# Altium PCB PCB1.PcbDoc
Units mm, origin at the board's own origin, x right, y up, seen from the top; angles counter-clockwise.
Board outline 105.66 x 101.6 mm, 5 copper layers (Top Layer, Mid-Layer 1, Mid-Layer 2, Mid-Layer 3, Bottom Layer); 15 components, 189 nets, 383 pads, 28 vias.
Unrouted connection lines stored in the file: 20.
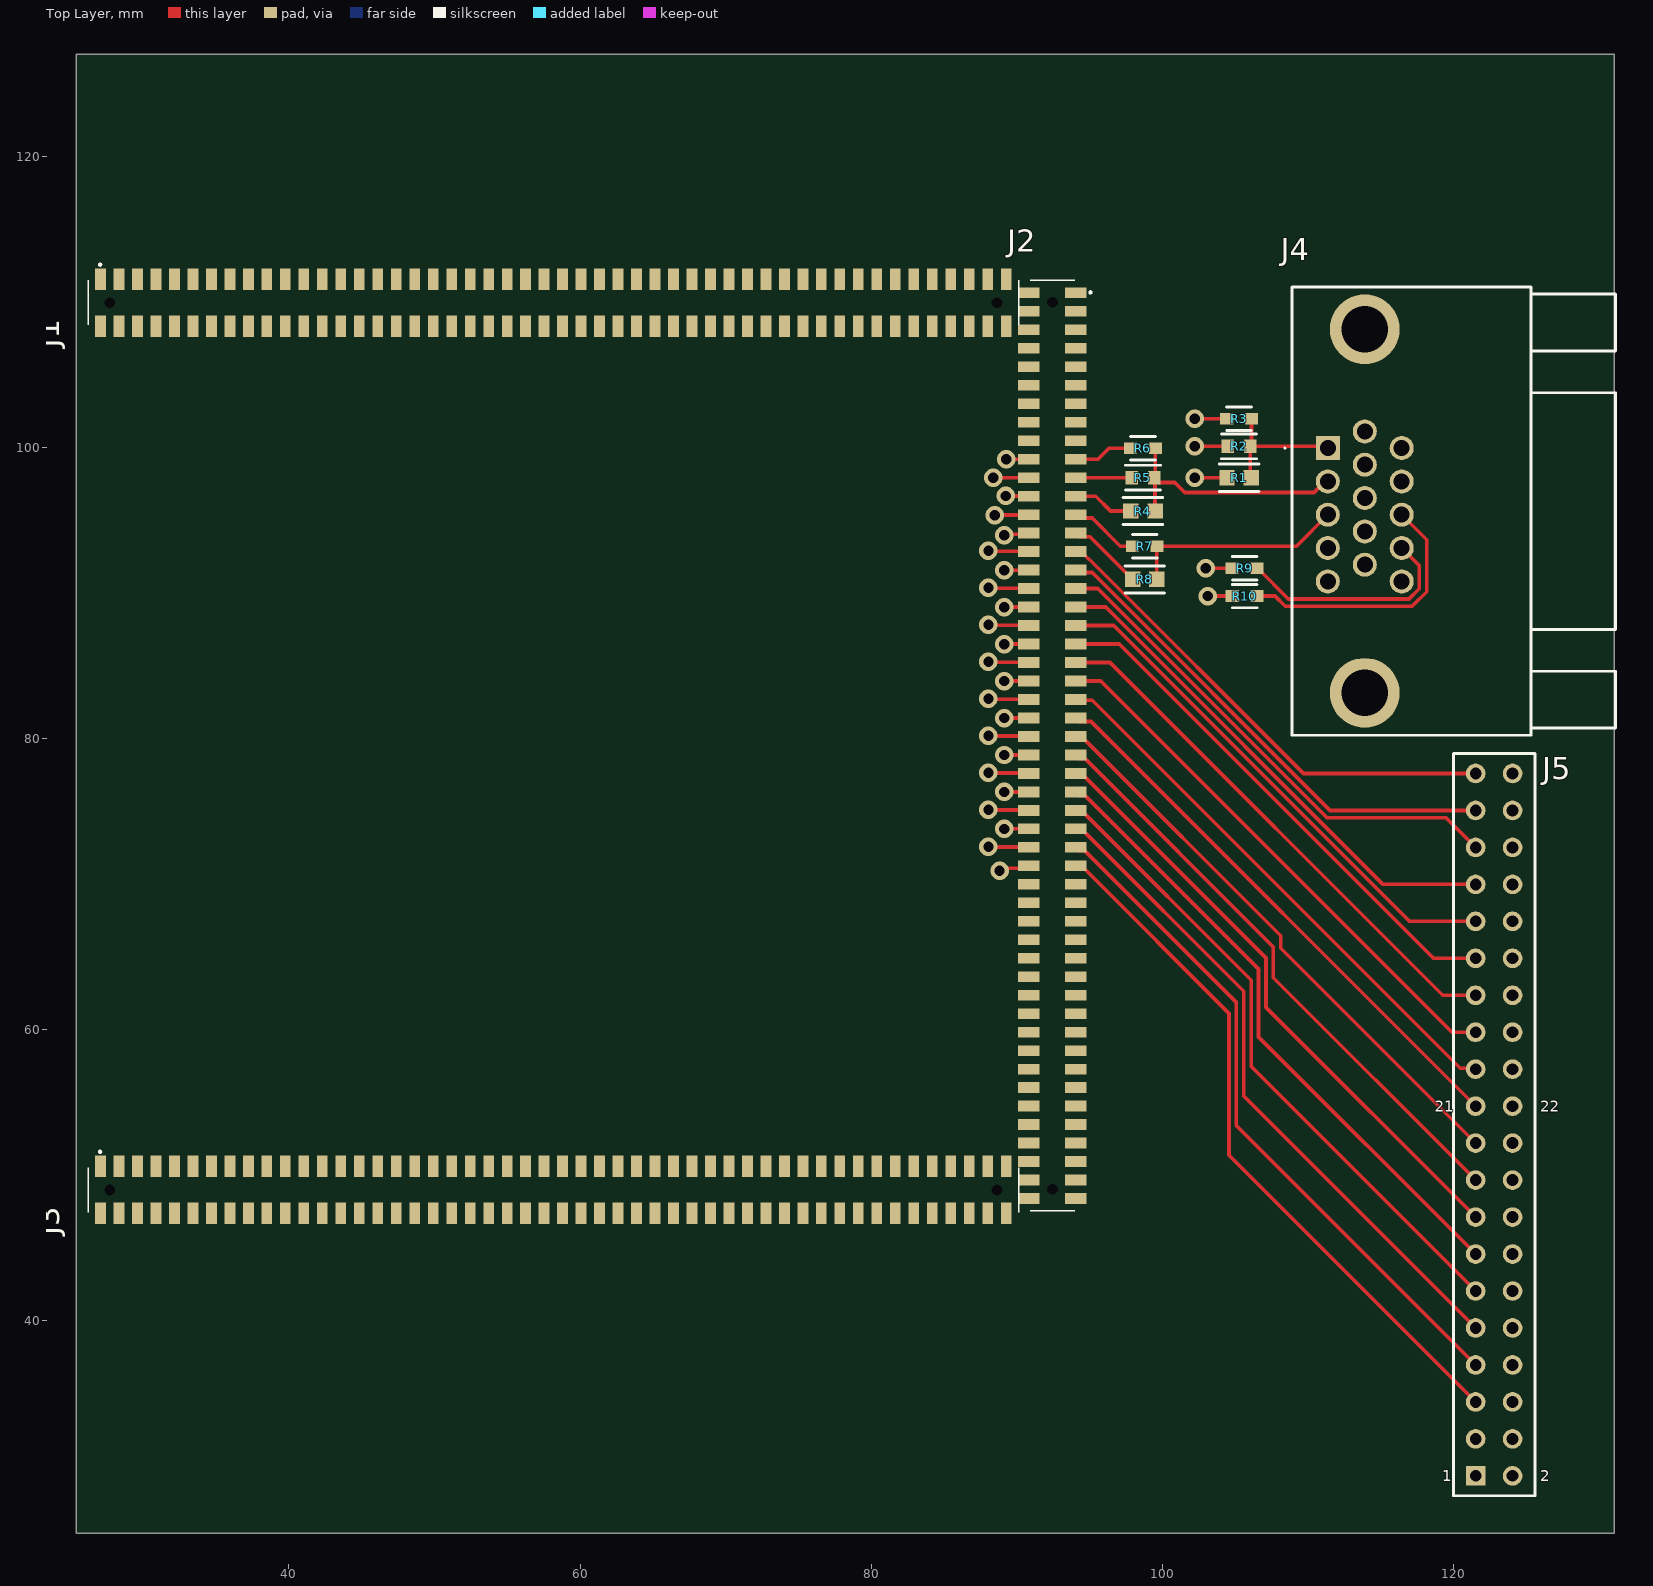
[diagram p0: Top Layer view]
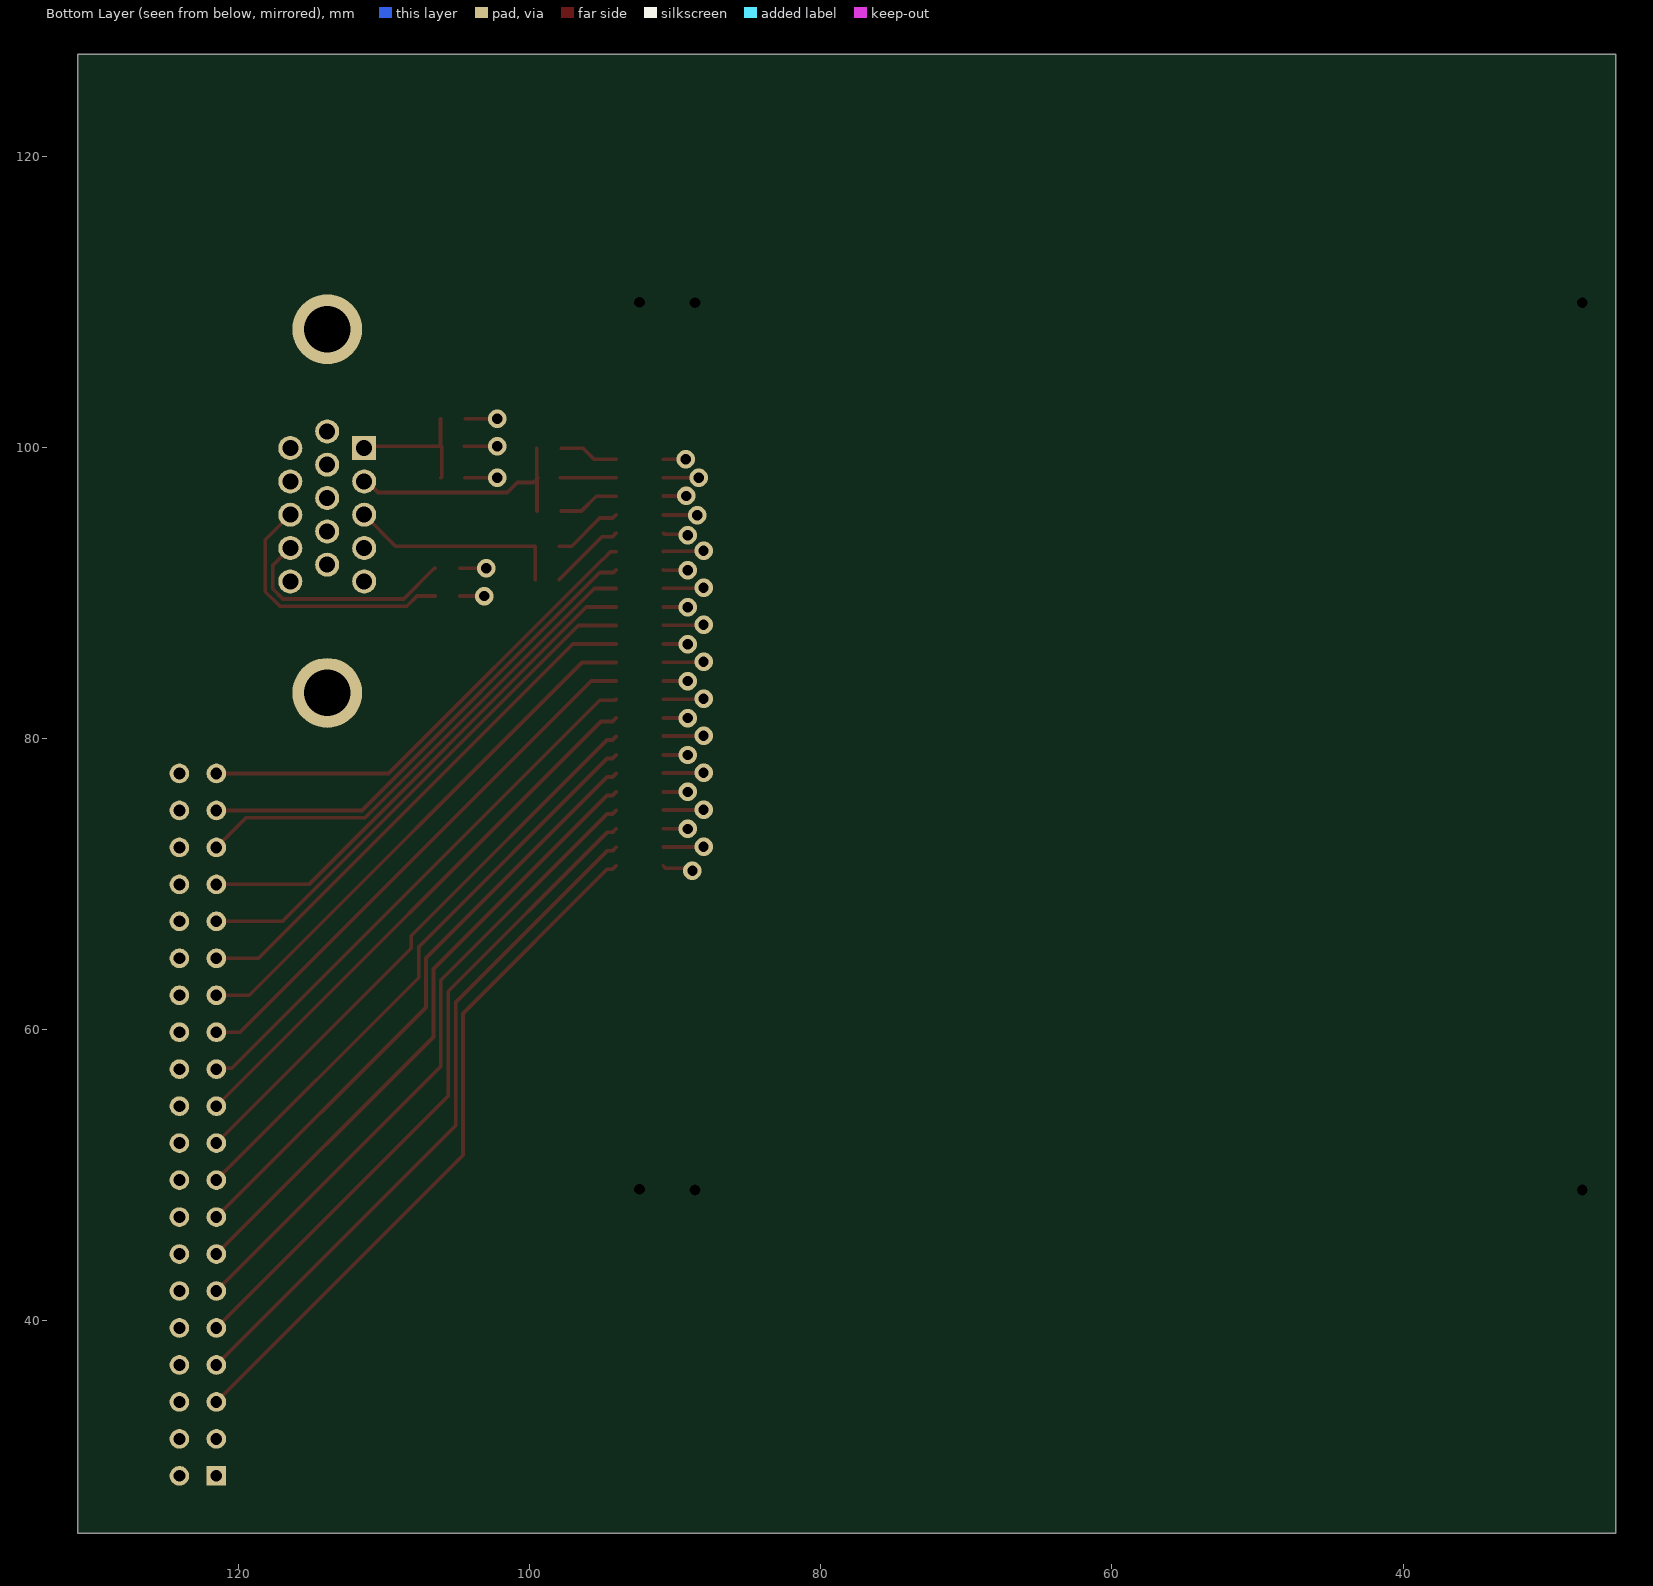
[diagram p1: Bottom Layer view, seen from below]
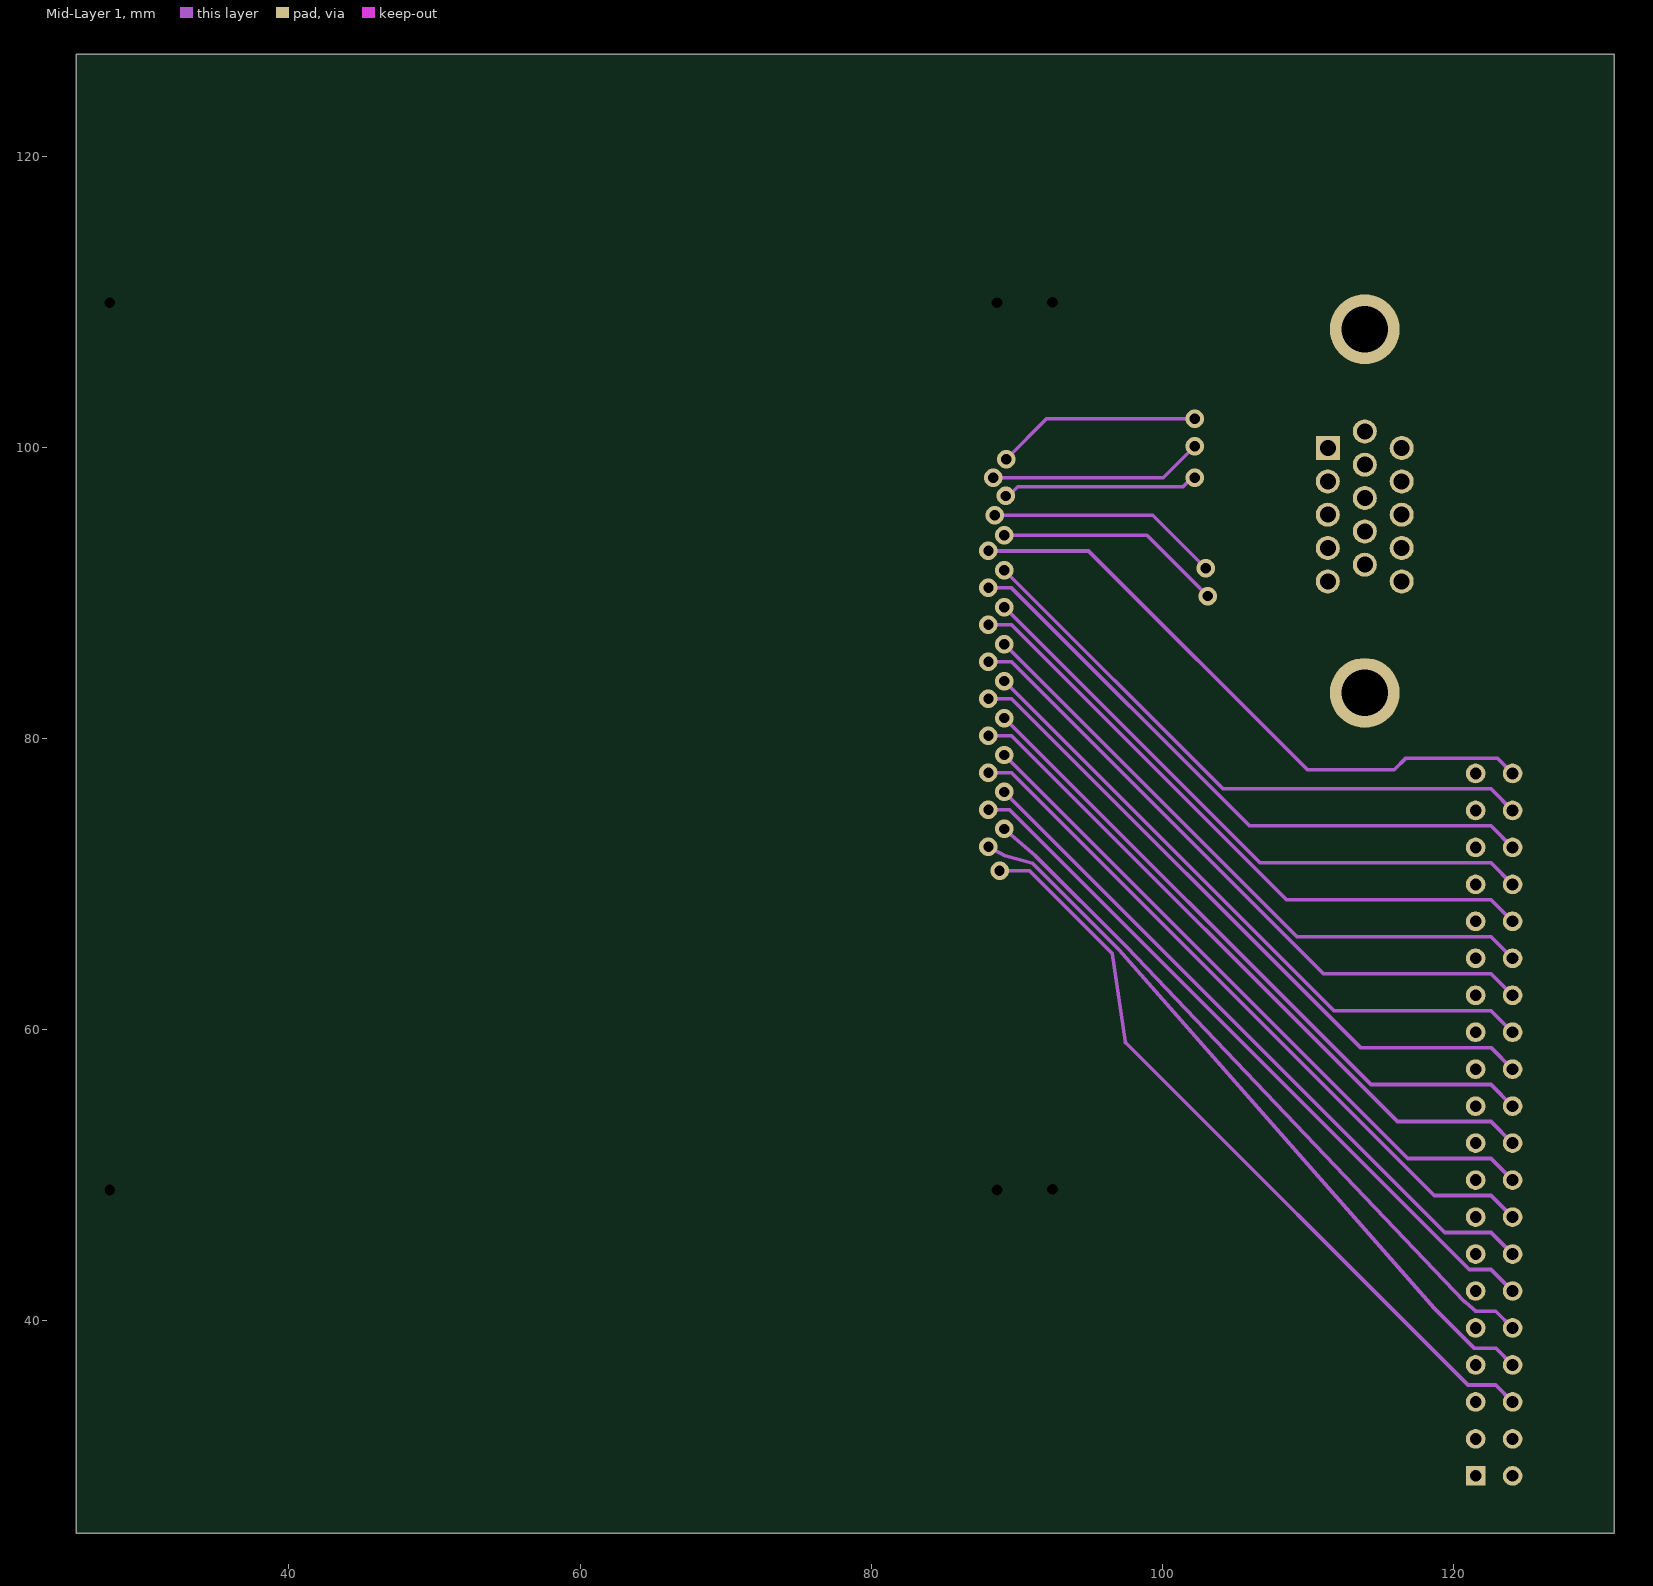
[diagram p2: Mid-Layer 1]
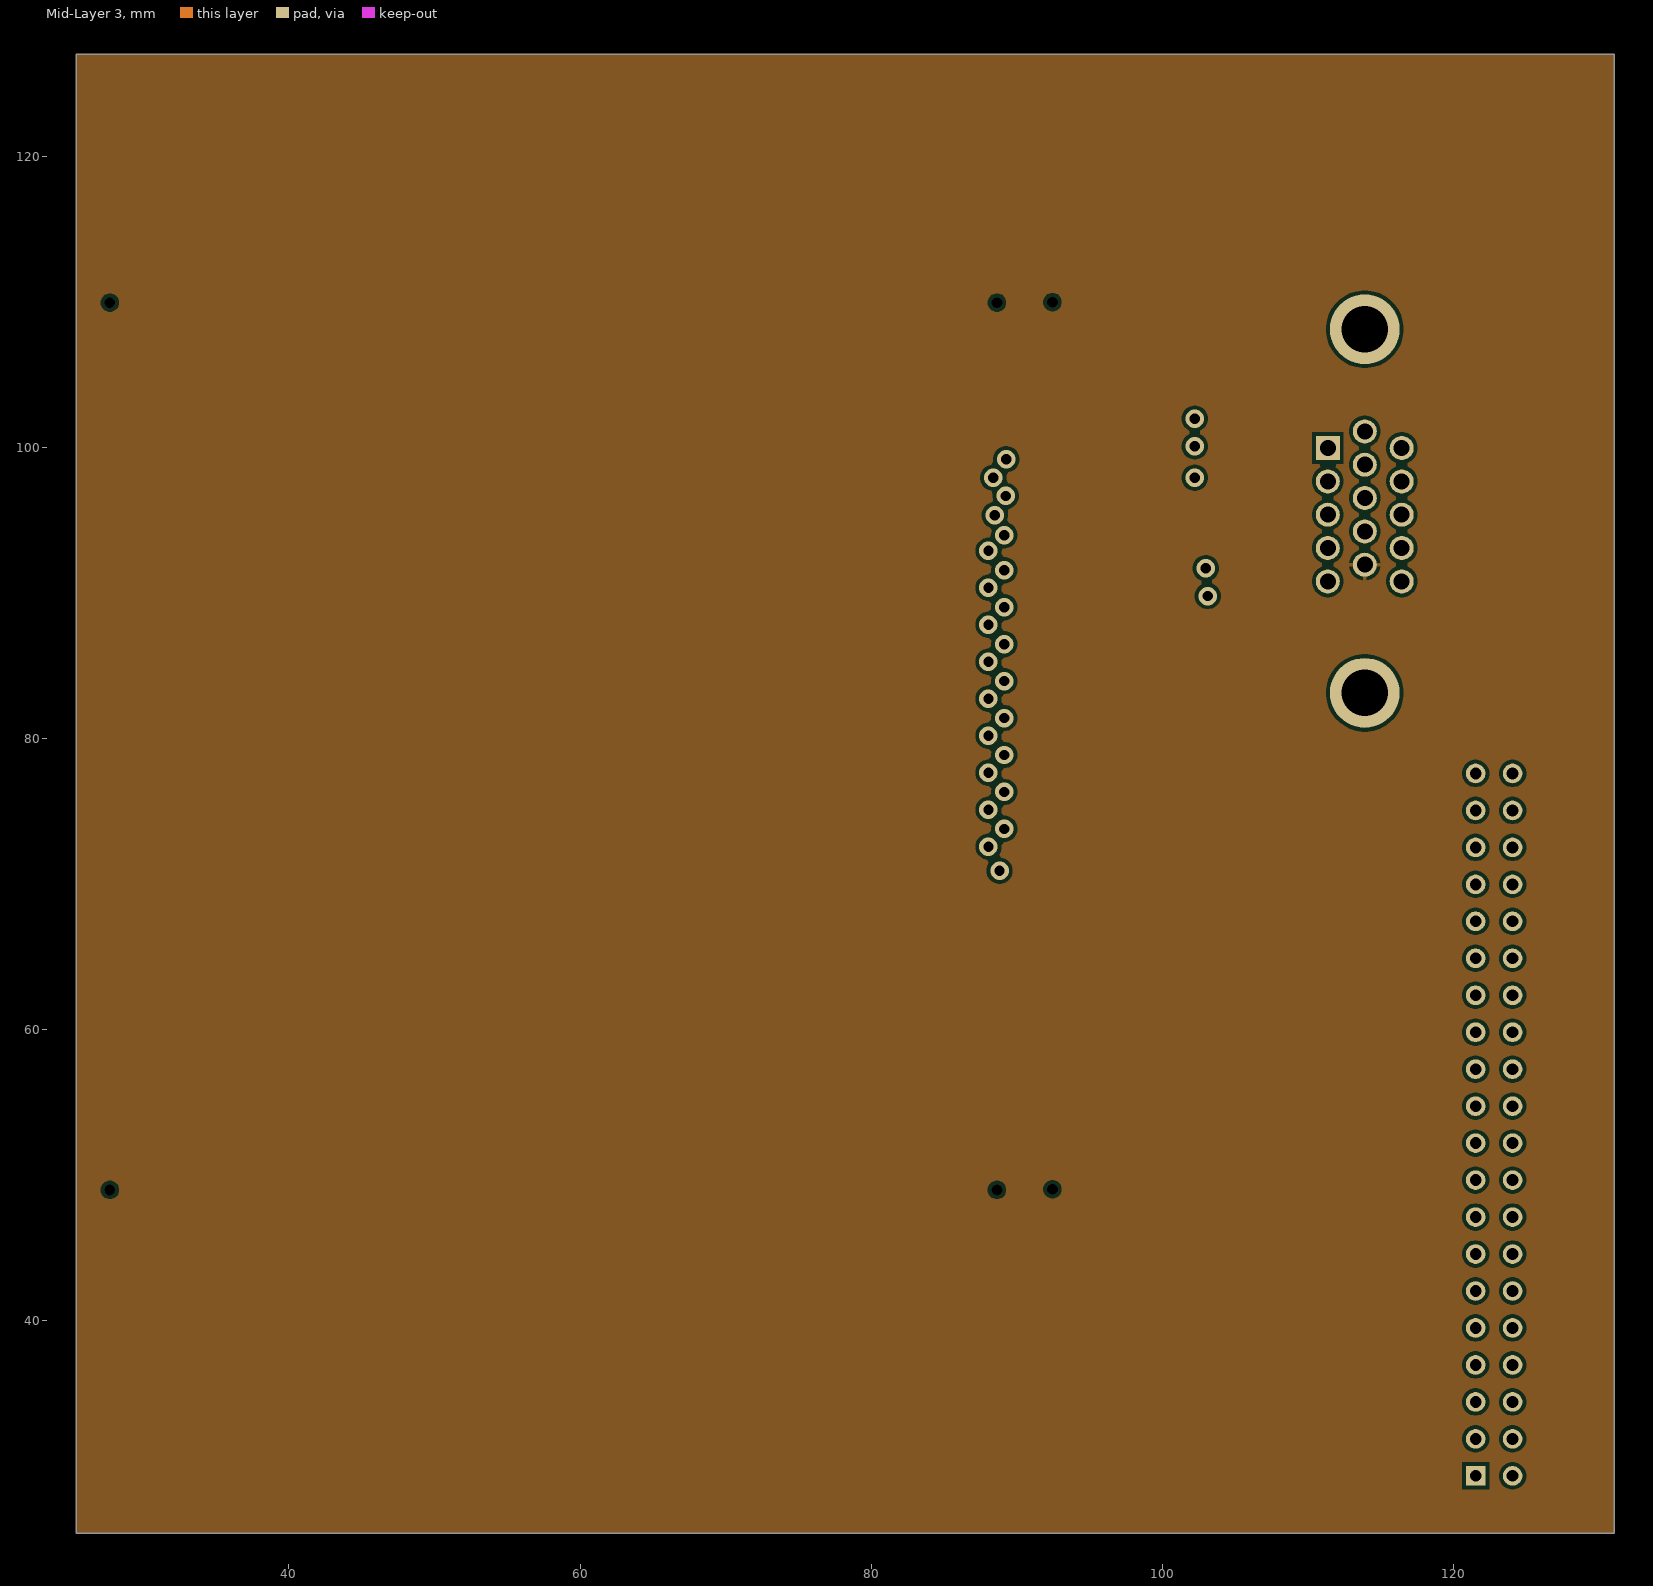
[diagram p3: Mid-Layer 3]
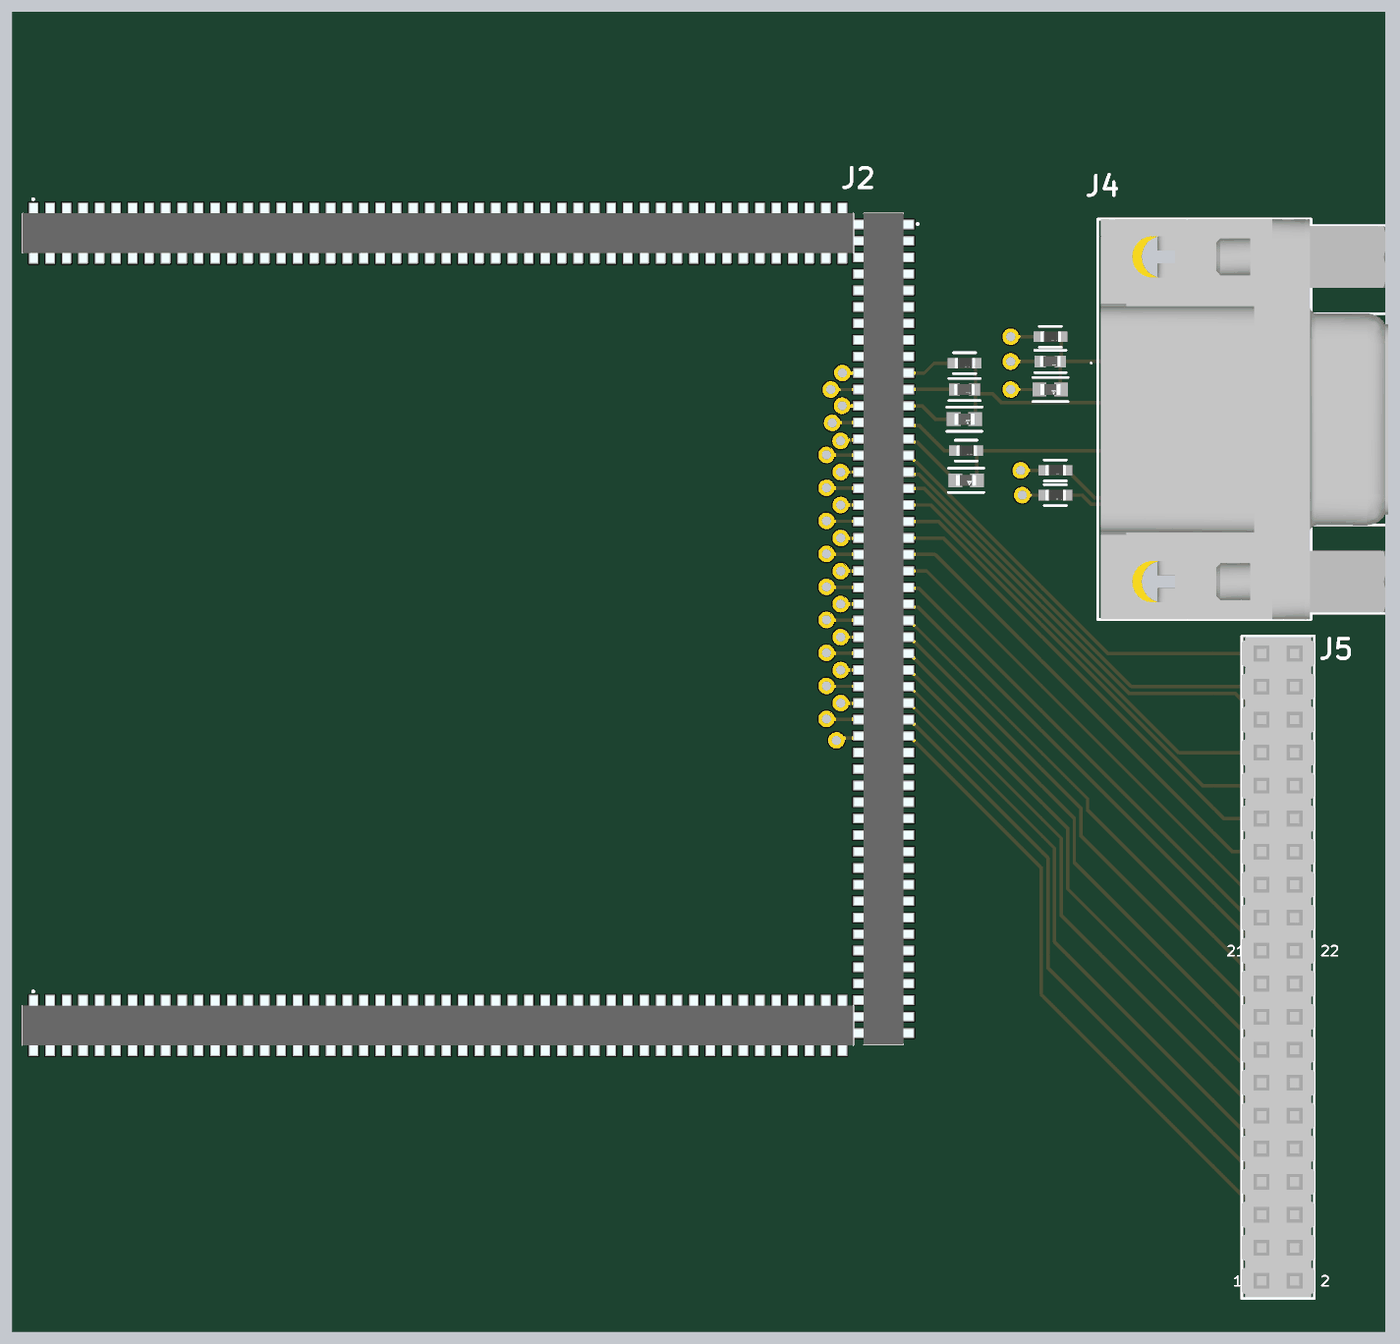
[diagram p4: 3D render of the assembled board from above, using the file's embedded part models]

## Layer stack, top to bottom
Top Solder: solder mask 0.0102, Solder Resist, Dk 3.5
Top Layer: signal copper 0.0356
Dielectric 1: dielectric 0.32, FR-4, Dk 4.8
Mid-Layer 1: signal copper 0.0356
Dielectric3: dielectric 0.32, FR-4, Dk 4.8
Mid-Layer 2: signal copper 0.0356
Dielectric4: dielectric 0.32, FR-4, Dk 4.8
Mid-Layer 3: signal copper 0.0356
Dielectric2: dielectric 0.32, FR-4, Dk 4.8
Bottom Layer: signal copper 0.0356
Bottom Solder: solder mask 0.0102, Solder Resist, Dk 3.5

## Board outline
25.4,25.4 131.064,25.4 131.064,127 25.4,127

## Design rules (kind name [scope] priority, off if disabled: settings)
Clearance [All] p1: gap=0.254 ignorepadtopadclearanceinfootprint=FALSE
PolygonConnect [All] p1: connectstyle=Relief reliefconductorwidth=0.254 reliefentries=4 polygonreliefangle="90 Angle" airgapwidth=0.254
RoutingVias [All] p1: holewidth=0.711 width=1.27 viastyle="Through Hole" minholewidth=0.711 minwidth=1.27 maxholewidth=0.711 maxwidth=1.27
SolderMaskExpansion [All] p1: expansion=0.102 istentingtop=FALSE
SupplyNets "Schematic Supply Nets_2" [InNet('VDD12')] p1: voltage=0.000
SupplyNets "Schematic Supply Nets_1" [InNet('VDD3.3')] p2: voltage=0.000
SupplyNets "Schematic Supply Nets" [InNet('GND')] p3: voltage=0.000
Width [All] p1: maxlimit=0.254 minlimit=0.254 preferedwidth=0.254
30 further rules are at their usual default settings.

## Classes and differential pairs
component class BOARD_GPIO: J5
component class VGA: J4 R1 R2 R3 R4 R5 R6 R7 R8 R9 R10
component class FPGA_GPIO: J1 J2 J3

## Components (designator, comment, footprint, x,y, rotation, side; value= is the part's Value field where it differs from the comment)
J1 "CLP-150-02-L-D-A" CLP-150-02-XXX-D-A 58.166,109.946 r180 top
J2 "CLP-150-02-L-D-A" CLP-150-02-XXX-D-A 92.456,79.507 r90 top
J3 "CLP-150-02-L-D-A" CLP-150-02-XXX-D-A 58.166,48.986 r180 top
J4 "L77HDE15SD1CH4FVGA" L77HDE15SD1CH4FVGA 111.379,99.957 r90 top
J5 "CES-120-02-L-D" SMTC-CES-120-02-X-D 121.539,29.337 r90 top
R1 "MCT06030C2001FP500" FP-MCT0603-IPC_A 105.283,97.917 r0 top
R2 "AT0603FRE071KL" FP-AT0603-IPC_B 105.283,100.076 r0 top
R3 "RT0603FRE07510RL" FP-RT0603-MFG 105.283,101.981 r0 top value=510Ω
R4 "MCT06030C2001FP500" FP-MCT0603-IPC_A 98.679,95.631 r0 top
R5 "AT0603FRE071KL" FP-AT0603-IPC_B 98.679,97.917 r0 top
R6 "RT0603FRE07510RL" FP-RT0603-MFG 98.679,99.949 r0 top value=510Ω
R7 "RT0603FRE07866RL" FP-RT0603-MFG 98.806,93.218 r0 top value=866Ω
R8 "MCT06030C4640FP500" FP-MCT0603-IPC_A 98.806,90.932 r0 top
R9 "RT0603FRE0747RL" FP-RT0603-MFG 105.664,91.694 r0 top value=47Ω
R10 "RT0603FRE0747RL" FP-RT0603-MFG 105.664,89.789 r0 top value=47Ω

## Footprints (in the part's own frame and the unit in brackets; to place one, negate y for a bottom-side part, rotate by r counter-clockwise, add the part's x,y. Pads: shape width x height; smd on the part's side, far side on the other; paste and mask are expansions set on the pad)
CLP-150-02-XXX-D-A [mm]
  rect 0.74x1.47 smd: 1(31.115,-1.615) 2(31.115,1.615) 3(29.845,-1.615) 4(29.845,1.615) 5(28.575,-1.615) 6(28.575,1.615) 7(27.305,-1.615) 8(27.305,1.615) 9(26.035,-1.615) 10(26.035,1.615) 11(24.765,-1.615) 12(24.765,1.615) 13(23.495,-1.615) 14(23.495,1.615) 15(22.225,-1.615) 16(22.225,1.615) 17(20.955,-1.615) 18(20.955,1.615) 19(19.685,-1.615) 20(19.685,1.615) 21(18.415,-1.615) 22(18.415,1.615) 23(17.145,-1.615) 24(17.145,1.615) 25(15.875,-1.615) 26(15.875,1.615) 27(14.605,-1.615) 28(14.605,1.615) 29(13.335,-1.615) 30(13.335,1.615) 31(12.065,-1.615) 32(12.065,1.615) 33(10.795,-1.615) 34(10.795,1.615) 35(9.525,-1.615) 36(9.525,1.615) 37(8.255,-1.615) 38(8.255,1.615) 39(6.985,-1.615) 40(6.985,1.615) 41(5.715,-1.615) 42(5.715,1.615) 43(4.445,-1.615) 44(4.445,1.615) 45(3.175,-1.615) 46(3.175,1.615) 47(1.905,-1.615) 48(1.905,1.615) 49(0.635,-1.615) 50(0.635,1.615) 51(-0.635,-1.615) 52(-0.635,1.615) 53(-1.905,-1.615) 54(-1.905,1.615) 55(-3.175,-1.615) 56(-3.175,1.615) 57(-4.445,-1.615) 58(-4.445,1.615) 59(-5.715,-1.615) 60(-5.715,1.615) 61(-6.985,-1.615) 62(-6.985,1.615) 63(-8.255,-1.615) 64(-8.255,1.615) 65(-9.525,-1.615) 66(-9.525,1.615) 67(-10.795,-1.615) 68(-10.795,1.615) 69(-12.065,-1.615) 70(-12.065,1.615) 71(-13.335,-1.615) 72(-13.335,1.615) 73(-14.605,-1.615) 74(-14.605,1.615) 75(-15.875,-1.615) 76(-15.875,1.615) 77(-17.145,-1.615) 78(-17.145,1.615) 79(-18.415,-1.615) 80(-18.415,1.615) 81(-19.685,-1.615) 82(-19.685,1.615) 83(-20.955,-1.615) 84(-20.955,1.615) 85(-22.225,-1.615) 86(-22.225,1.615) 87(-23.495,-1.615) 88(-23.495,1.615) 89(-24.765,-1.615) 90(-24.765,1.615) 91(-26.035,-1.615) 92(-26.035,1.615) 93(-27.305,-1.615) 94(-27.305,1.615) 95(-28.575,-1.615) 96(-28.575,1.615) 97(-29.845,-1.615) 98(-29.845,1.615) 99(-31.115,-1.615) 100(-31.115,1.615)
  round 0.37 hole 0.74 unplated: 101(30.475,0) 102(-30.475,0)
  silkscreen extent -31.96,-2.66 31.96,1.52, body extent -31.97,-2.28 31.97,2.28, height 2.47
FP-AT0603-IPC_B [mm]
  rect 0.859x0.912 smd paste+0 mask+0: 1(-0.777,0) 2(0.777,0)
  silkscreen extent -1.21,-0.86 1.21,0.86, body extent -1.46,-0.71 1.46,0.71, height 0.25
FP-MCT0603-IPC_A [mm]
  rect 1.064x1.062 smd paste+0 mask+0: 1(-0.829,0) 2(0.829,0)
  silkscreen extent -1.36,-0.93 1.36,0.93, body extent -1.86,-1.03 1.86,1.03, height 0.25
FP-RT0603-MFG [mm]
  rect 0.9x0.8 smd paste+0 mask+0: 1(-0.85,0) 2(0.85,0)
  silkscreen extent -0.85,-0.81 0.86,0.8, body extent -1.4,-0.55 1.4,0.55, height 0.25
L77HDE15SD1CH4FVGA [mm]
  rect 1.65x1.65 hole 1.1: 1(0,0)
  round 1.65 hole 1.1: 2(-2.29,0) 3(-4.58,0) 4(-6.87,0) 5(-9.16,0) 6(1.145,-2.54) 7(-1.145,-2.54) 8(-3.435,-2.54) 9(-5.725,-2.54) 10(-8.015,-2.54) 11(0,-5.08) 12(-2.29,-5.08) 13(-4.58,-5.08) 14(-6.87,-5.08) 15(-9.16,-5.08)
  round 4.8 hole 3.2: MH1(8.165,-2.54) MH2(-16.825,-2.54)
  silkscreen extent -19.74,-19.77 11.07,3, body extent -19.73,-19.89 11.08,2.21, height 12.48
SMTC-CES-120-02-X-D [mm] "Closed Entry Socket Strip Double Row Assembly, 2x20 Pins, Vertical, 2.54mm Pitch, Female"
  rect 1.35x1.35 hole 0.81: 1(0,0)
  round 1.35 hole 0.81: 2(0,-2.54) 3(2.54,0) 4(2.54,-2.54) 5(5.08,0) 6(5.08,-2.54) 7(7.62,0) 8(7.62,-2.54) 9(10.16,0) 10(10.16,-2.54) 11(12.7,0) 12(12.7,-2.54) 13(15.24,0) 14(15.24,-2.54) 15(17.78,0) 16(17.78,-2.54) 17(20.32,0) 18(20.32,-2.54) 19(22.86,0) 20(22.86,-2.54) 21(25.4,0) 22(25.4,-2.54) 23(27.94,0) 24(27.94,-2.54) 25(30.48,0) 26(30.48,-2.54) 27(33.02,0) 28(33.02,-2.54) 29(35.56,0) 30(35.56,-2.54) 31(38.1,0) 32(38.1,-2.54) 33(40.64,0) 34(40.64,-2.54) 35(43.18,0) 36(43.18,-2.54) 37(45.72,0) 38(45.72,-2.54) 39(48.26,0) 40(48.26,-2.54)
  silkscreen extent -1.37,-4.07 49.63,1.53, body extent -1.27,-4.06 49.53,1.52, height 5.08

## Part data
J1 J2 J3: "Connector", Manufacturer_Name=SAMTEC, Datasheet Link=http://suddendocs.samtec.com/prints/erm8-xxx-xx.x-xxx-dv-xxxx-xx-mkt.pdf, Height=2.37mm, Manufacturer_Part_Number=CLP-150-02-L-D-A
J4: "Connector", Manufacturer_Name="Amphenol Communications Solutions", Mouser Part Number=523-7HDE15SD1CH4FVGA, Arrow Part Number=L77HDE15SD1CH4FVGA, Arrow Price/Stock=https://www.arrow.com/en/products/l77hde15sd1ch4fvga/amphenol-fci?region=nac, Datasheet Link=https://cdn.amphenol-cs.com/media/wysiwyg/files/drawing/l77hde15sd1ch4fvga.pdf, Height=12.85mm, Manufacturer_Part_Number=L77HDE15SD1CH4FVGA, Mouser Price/Stock=https://www.mouser.co.uk/ProductDetail/Amphenol-Commercial-Products/L77HDE15SD1CH4FVGA?qs=ToP8pWlZ0bNtQSp9f8k5Rw%3D%3D
J5: library part CMP-1023-00041-1, "Low Profile Socket Strips, Through-hole, Vertical, -55 to 125 degC, 2.54 mm Pitch, 40-Pin, Female, RoHS", Manufacturer=Samtec, Temperature Range="-55 to 125 degC", ComponentLink1Description="Manufacturer URL", ComponentLink1URL=http://www.samtec.com, ComponentLink2Description=Datasheet, ComponentLink2URL=http://www.samtec.com/documents/webfiles/pdf/CES.PDF, ComponentLink3Description="Package Specification", ComponentLink3URL=http://www.samtec.com/documents/webfiles/cpdf/CES-1XX-XX-X-D%20-MKT.pdf, DatasheetVersion=F-214, Mounting Technology=Through-hole, Orientation=Vertical, PackageDescription="Closed Entry Socket Strip Double Row Assembly", PackageReference=CES-120-02-X-D, PackageVersion="Y, 9/1992", PartNumber=CES-120-02-L-D, Pitch="2.54 mm", RoHS=True
R1 R4: library part CMP-02407-000403-1, "RES SMD 100 OHM 1% 1/8W 0603", Case Code (Imperial)=0603, Case Code (Metric)=1608, Max Operating Temperature=125°C, Max Power Dissipation=125mW, Min Operating Temperature=-55°C, Package Quantity=1, Power Rating=100mW, Resistance=2kR, Temperature Coefficient=50ppm/°C, Tolerance=1%, Voltage Rating=75V, Case/Package=0603, Composition="Thin Film", Contact Plating=Tin, Depth=0.85mm, Height=0.022inch, Lead Free="Lead Free", Length=1.55mm, Military Standard=Not, Mount="Surface Mount", Number of Terminations=2, Packaging="Tape and Reel", Radiation Hardening=No, REACH SVHC="No SVHC", Voltage Rating (DC)=75V, Width=0.033inch
R2 R5: library part CMP-03412-039220-1, "Thin Film Chip Resistors Automotive Grade 1kΩ 1% 50ppm/°C 0603", Case Code (Imperial)=0603, Case Code (Metric)=1608, Max Operating Temperature=155°C, Max Power Dissipation=100mW, Min Operating Temperature=-55°C, Ratings=AEC-Q200, Resistance=1kR, Resistor Type="Thin Film", Temperature Coefficient=50ppm/°C, Tolerance=1%, Case/Package=0603, Features="Moisture Resistant", Height=0.022inch, Length=0.063inch, Number of Terminations=2, Packaging="Cut Tape", RoHS Compliant=Yes, Series=AT, Width=0.032inch
R3 R6: library part CMP-2000-04767-2, "RES SMD 510 OHM 1% 1/10W 0603", Manufacturer=Yageo, Package=RT0603, Power Rating=0.1W, Resistance=510Ω, Temperature="-55°C to +155°C", Temperature Coefficient="50 ppm/°C", Temperature Range High=+155°C, Temperature Range Low=-55°C, Tolerance=0.01, Voltage Rating=75V, Automotive=No, Category=Res, ComponentLink2Description=Datasheet, ComponentLink2URL=http://www.yageo.com/documents/recent/PYu-RT_1-to-0.01_RoHS_L_9.pdf, Composition="Thin Film", Device Class L1="Passive Components", Device Class L2=Resistors, Device Class L3="Chip SMD Resistors", Digikey Description="RES SMD 510 OHM 1% 1/10W 0603", Footprint Url=http://www.yageo.com/exep/pages/download/literatures/PYu-R_Mount_10.pdf, Height=0.55mm, Ipc Land Pattern Name=RESC16080X45, Lead Free=Yes, Manufacturer Part Number=RT0603FRE07510RL, Mouser Description="Res Thin Film 0603 510 Ohm 1% 1/10W ±50ppm/°C Molded SMD SMD Paper T/R", Octopart=https://octopart.com/rt0603fre07510rl-yageo-1398442, RoHS=TRUE, Series=RT
R7: library part CMP-2000-04803-2, "RES SMD 866 OHM 1% 1/10W 0603", Manufacturer=Yageo, Package=RT0603, Power Rating=0.1W, Resistance=866Ω, Temperature="-55°C to +155°C", Temperature Coefficient="50 ppm/°C", Temperature Range High=+155°C, Temperature Range Low=-55°C, Tolerance=0.01, Voltage Rating=75V, Automotive=No, Category=Res, ComponentLink2Description=Datasheet, ComponentLink2URL=http://www.yageo.com/documents/recent/PYu-RT_1-to-0.01_RoHS_L_9.pdf, Composition="Thin Film", Device Class L1="Passive Components", Device Class L2=Resistors, Device Class L3="Chip SMD Resistors", Digikey Description="RES SMD 866 OHM 1% 1/10W 0603", Footprint Url=http://www.yageo.com/exep/pages/download/literatures/PYu-R_Mount_10.pdf, Height=0.55mm, Ipc Land Pattern Name=RESC16080X45, Lead Free=Yes, Manufacturer Part Number=RT0603FRE07866RL, Mouser Description="Thin Film Resistors - SMD 1/10W 866 ohm 1% 50ppm", Octopart=https://octopart.com/rt0603fre07866rl-yageo-1233978, RoHS=TRUE, Series=RT
R8: library part CMP-02407-000539-1, "RES SMD 100 OHM 1% 1/8W 0603", Case Code (Imperial)=0603, Case Code (Metric)=1608, Max Operating Temperature=125°C, Min Operating Temperature=-55°C, Power Rating=100mW, Resistance=464R, Temperature Coefficient=50ppm/°C, Tolerance=1%, Voltage Rating=75V, Case/Package=0603, Composition="Thin Film", Contact Plating=Tin, Depth=0.85mm, Lead Free="Lead Free", Length=1.55mm, Military Standard=Not, Mount="Surface Mount", Packaging="Cut Tape", Radiation Hardening=No, Voltage Rating (DC)=75V, Width=850um
R9 R10: library part CMP-03412-032644-1, "RES SMD 47 OHM 1% 1/10W 0603", Manufacturer=Yageo, Package=RT0603, Power Rating=0.1W, Resistance=47Ω, Temperature="-55°C to +155°C", Temperature Coefficient="50 ppm/°C", Temperature Range High=+155°C, Temperature Range Low=-55°C, Tolerance=0.01, Voltage Rating=75V, Automotive=No, Category=Res, ComponentLink2Description=Datasheet, ComponentLink2URL=http://www.yageo.com/documents/recent/PYu-RT_1-to-0.01_RoHS_L_9.pdf, Composition="Thin Film", Device Class L1="Passive Components", Device Class L2=Resistors, Device Class L3="Chip SMD Resistors", Digikey Description="RES SMD 47 OHM 1% 1/10W 0603", Footprint Url=http://www.yageo.com/exep/pages/download/literatures/PYu-R_Mount_10.pdf, Height=0.55mm, Ipc Land Pattern Name=RESC16080X45, Lead Free=Yes, Manufacturer Part Number=RT0603FRE0747RL, Mouser Description="RT Series 0603 0.1 W 47 Ohm ±1 % ±50 ppm/°C SMT Thin Film Chip Resistor", Octopart=https://octopart.com/rt0603fre0747rl-yageo-39813773, RoHS=TRUE, Series=RT

## Via types
v1: diameter 1.27, hole 0.711, Top Layer to Bottom Layer, 28 vias

## Nets (pads, with @x,y where several pads share a name; then routed paths per layer and width w, separated by ;. In a path a pad name is that pad's centre, name@x,y a point inside that pad or via, vN(x,y) a via of type N, cw(c..) or ccw(c..) an arc to the next point about the centre after c; other vN are vias at no path point)
64_L1_N: J1.40
64_L1_P: J1.39
64_L2_N: J1.47
64_L2_P: J1.48
64_L3_N: J1.46
64_L3_P: J1.45
64_L4_N: J1.38
64_L4_P: J1.37
64_L5_N: J1.49
64_L5_P: J1.50
64_L6_N: J1.35
64_L6_P: J1.36
64_L7_N: J1.56
64_L7_P: J1.55
64_L9_N: J1.53
64_L9_P: J1.54
64_L11_N: J1.58
64_L11_P: J1.57
64_L12_N: J1.52
64_L12_P: J1.51
64_L13_N: J1.71
64_L13_P: J1.72
64_L14_N: J1.73
64_L14_P: J1.74
64_L15_N: J1.61
64_L15_P: J1.62
64_L16_N: J1.67
64_L16_P: J1.68
64_L17_N: J1.66
64_L17_P: J1.65
64_L18_N: J1.75
64_L18_P: J1.76
64_L19_N: J1.33
64_L19_P: J1.34
64_L21_N: J1.63
64_L21_P: J1.64
64_L22_N: J1.69
64_L22_P: J1.70
64_L23_N: J1.77
64_L23_P: J1.78
64_L24_N: J1.60
64_L24_P: J1.59
65_L16_N: J1.43
65_L16_P: J1.44
65_L17_N: J3.21
65_L17_P: J3.22
65_L18_N: J1.42
65_L18_P: J1.41
65_L20_N: J3.55
65_L20_P: J3.56
65_L21_N: J1.32
65_L21_P: J1.31
65_L22_N: J1.30
65_L22_P: J1.29
65_L23_N: J3.62
65_L23_P: J3.61
65_L24_N: J3.33
65_L24_P: J3.34
66_L5_N: J3.43
66_L5_P: J3.44
66_L8_N: J1.26
66_L8_P: J1.25
66_L9_N: J3.23
66_L9_P: J3.24
66_L10_N: J1.28
66_L10_P: J1.27
66_L15_N: J3.25
66_L15_P: J3.26
66_L17_N: J3.28
66_L17_P: J3.27
67_L1_N: J3.80
67_L1_P: J3.79
67_L2_N: J3.70
67_L2_P: J3.69
67_L3_N: J3.78
67_L3_P: J3.77
67_L4_N: J3.57
67_L4_P: J3.58
67_L5_N: J3.72
67_L5_P: J3.71
67_L6_N: J3.68
67_L6_P: J3.67
67_L7_N: J3.76
67_L7_P: J3.75
67_L9_N: J3.41
67_L9_P: J3.42
67_L10_N: J3.45
67_L10_P: J3.46
67_L12_N: J3.53
67_L12_P: J3.54
67_L13_N: J3.51
67_L13_P: J3.52
67_L14_N: J3.49
67_L14_P: J3.50
67_L15_N: J3.66
67_L15_P: J3.65
67_L16_N: J3.60
67_L16_P: J3.59
67_L17_N: J3.74
67_L17_P: J3.73
67_L18_N: J3.47
67_L18_P: J3.48
67_L19_N: J3.31
67_L19_P: J3.32
67_L20_N: J3.39
67_L20_P: J3.40
67_L22_N: J3.37
67_L22_P: J3.38
67_L23_N: J3.29
67_L23_P: J3.30
67_L24_N: J3.35
67_L24_P: J3.36
A9: J2.86
A10: J2.84
A12: J2.81
A13: J2.80
A14: J2.75
AA13: J2.31 J5.37 | length 34.3
  Top Layer w0.254: J2.31 94.241,91.402 95.187,91.402 111.531,75.057 J5.37
AA14: J2.32 J5.38 | length 43.5
  Top Layer w0.254: v1(89.154,91.567) 89.156,91.569 90.839,91.569 J2.32
  Mid-Layer 1 w0.254: v1(89.154,91.567) 104.18,76.541 122.595,76.541 J5.38
AB14: J2.29 J5.39 | length 33.8
  Top Layer w0.254: J2.29 94.436,92.842 94.955,92.323 94.984,92.323 109.71,77.597 J5.39
AB16: J2.30 J5.40 | length 45.8
  Top Layer w0.254: v1(88.063,92.889) 88.087,92.866 90.817,92.866 J2.30
  Mid-Layer 1 w0.254: v1(88.063,92.889) 94.944,92.889 109.982,77.851 115.953,77.851 116.755,78.653 123.023,78.653 J5.40
AC13: J2.27 R8.1 | length 5.2
  Top Layer w0.254: J2.27 94.314,93.869 95.039,93.869 R8.1
AC14: J2.28 R10.1 | length 19.2
  Top Layer w0.254: v1(89.144,93.964) 89.218,94.038 90.767,94.038 J2.28 ; v1(103.124,89.789) R10.1
  Mid-Layer 1 w0.254: v1(89.144,93.964) 98.949,93.964 v1(103.124,89.789)
AD13: J2.25 R7.1 | length 4.8
  Top Layer w0.254: J2.25 94.306,95.147 95.187,95.147 97.116,93.218 R7.1
AD14: J2.26 R9.1 | length 20.2
  Top Layer w0.254: v1(88.501,95.346) 88.519,95.364 90.823,95.364 J2.26 ; v1(102.997,91.694) R9.1
  Mid-Layer 1 w0.254: v1(88.501,95.346) 99.345,95.346 v1(102.997,91.694)
AD15: J2.20 R3.1 | length 17.9
  Top Layer w0.254: v1(89.281,99.187) 89.283,99.189 90.838,99.189 J2.20 ; v1(102.235,101.981) R3.1
  Mid-Layer 1 w0.254: v1(89.281,99.187) 92.075,101.981 v1(102.235,101.981)
ADC_VN: J3.63
ADC_VP: J3.64
AE13: J2.23 R4.1 | length 4.2
  Top Layer w0.254: J2.23 95.43,96.652 96.451,95.631 R4.1
AE15: J2.24 R1.1 | length 17.3
  Top Layer w0.254: v1(89.262,96.666) 89.269,96.659 90.834,96.659 J2.24 ; v1(102.235,97.917) R1.1
  Mid-Layer 1 w0.254: v1(89.262,96.666) 89.448,96.666 90.073,97.291 101.424,97.291 102.049,97.917 v1(102.235,97.917)
AF13: J2.21 R5.1 | length 3.8
  Top Layer w0.254: J2.21 97.897,97.922 R5.1
AF14: J2.22 R2.1 | length 19.5
  Top Layer w0.254: v1(88.392,97.917) 88.394,97.919 90.838,97.919 J2.22 ; v1(102.235,100.076) R2.1
  Mid-Layer 1 w0.254: v1(88.392,97.917) 100.076,97.917 v1(102.235,100.076)
AF15: J2.19 R6.1 | length 4.1
  Top Layer w0.254: J2.19 95.592,99.192 96.35,99.949 R6.1
B9: J2.83
B10: J2.82
B11: J2.79
B12: J2.78
B14: J2.74
C9: J2.70
C11: J2.69
C12: J2.77
C13: J2.76
C14: J2.73
D9: J2.68
D10: J2.67
D11: J2.61 J5.7 | length 47.2
  Top Layer w0.254: J2.61 94.314,72.279 94.688,72.279 105.099,61.868 105.099,53.397 J5.7
D13: J2.72
D14: J2.71
E10: J2.66
E11: J2.65
E12: J2.62 J5.8 | length 54.2
  Top Layer w0.254: v1@88.087,72.546 J2.62@90.817,72.546
  Mid-Layer 1 w0.254: v1(88.063,72.569) 89.212,71.951 91.091,71.426 96.774,65.743 97.022,65.494 118.704,40.839 121.429,38.113 122.923,38.113 J5.8
F9: J2.64 J5.6 | length 55.3
  Top Layer w0.254: v1(88.825,70.918) 88.992,71.085 90.674,71.085 J2.64@90.839,71.249
  Mid-Layer 1 w0.254: v1(88.825,70.918) 90.88,70.918 96.514,65.284 96.574,65.224 97.463,59.199 97.475,59.116 97.534,59.057 121.018,35.573 122.923,35.573 J5.6
F10: J2.63 J5.5 | length 48.4
  Top Layer w0.254: J2.63 94.314,71.009 94.688,71.009 104.591,61.106 104.591,51.365 J5.5
F12: J2.57 J5.11 | length 44.6
  Top Layer w0.254: J2.57 94.314,74.819 94.688,74.819 106.115,63.392 106.115,57.461 J5.11
F13: J2.58 J5.12 | length 52.4
  Top Layer w0.254: v1@88.087,75.086 J2.58@90.817,75.086
  Mid-Layer 1 w0.254: v1(88.063,75.109) 89.513,75.109 121.102,43.521 122.595,43.521 J5.12
F14: J2.60 J5.10 | length 51.1
  Top Layer w0.254: v1@89.156,73.789 J2.60@90.839,73.789
  Mid-Layer 1 w0.254: v1(89.154,73.787) 91.301,71.934 97.53,65.704 120.775,41.308 ; 120.775,41.308 ccw(c121.539,42.037) 120.854,41.233 121.535,40.653 122.923,40.653 J5.10
G9: J2.45 J5.23 | length 38
  Top Layer w0.254: J2.45 94.121,82.632 95.187,82.632 120.483,57.336 121.48,57.336 J5.23
G10: J2.46 J5.24 | length 49.3
  Top Layer w0.254: v1@88.087,82.706 J2.46@90.817,82.706
  Mid-Layer 1 w0.254: v1(88.063,82.729) 89.653,82.729 113.622,58.761 122.595,58.761 J5.24
G11: J2.55 J5.13 | length 43.4
  Top Layer w0.254: J2.55 94.314,76.089 94.688,76.089 106.623,64.154 106.623,59.493 J5.13
G12: J2.56 J5.14 | length 49.8
  Top Layer w0.254: v1@89.156,76.329 J2.56@90.839,76.329
  Mid-Layer 1 w0.254: v1(89.154,76.327) 119.42,46.061 122.595,46.061 J5.14
G14: J2.59 J5.9 | length 45.9
  Top Layer w0.254: J2.59 94.314,73.549 94.688,73.549 105.607,62.63 105.607,55.429 J5.9
GND: J1.1 J1.2 J1.3 J1.4 J1.5 J1.6 J1.13 J1.14 J3.1 J3.2 J3.3 J3.4 J3.81 J3.82 J4.10
H9: J2.43 J5.25 | length 37.5
  Top Layer w0.254: J2.43 95.772,83.952 119.907,59.817 J5.25
H11: J2.50 J5.20 | length 50.3
  Top Layer w0.254: v1@88.087,80.166 J2.50@90.817,80.166
  Mid-Layer 1 w0.254: v1(88.063,80.189) 89.653,80.189 116.162,53.681 122.595,53.681 J5.20
H12: J2.44 J5.26 | length 46.6
  Top Layer w0.254: v1@89.156,83.949 J2.44@90.839,83.949
  Mid-Layer 1 w0.254: v1(89.154,83.947) 111.8,61.301 122.595,61.301 J5.26
H13: J2.51 J5.17 | length 40.8
  Top Layer w0.254: J2.51 94.314,78.629 94.688,78.629 107.639,65.678 107.639,63.557 J5.17
H14: J2.52 J5.18 | length 48.7
  Top Layer w0.254: v1@89.156,78.869 J2.52@90.839,78.869
  Mid-Layer 1 w0.254: v1(89.154,78.867) 116.88,51.141 122.595,51.141 J5.18
J9: J2.41 J5.27 | length 36.9
  Top Layer w0.254: J2.41 96.407,85.222 119.272,62.357 J5.27
J10: J2.42 J5.28 | length 48.2
  Top Layer w0.254: v1@88.087,85.246 J2.42@90.817,85.246
  Mid-Layer 1 w0.254: v1(88.063,85.269) 89.653,85.269 111.082,63.841 122.595,63.841 J5.28
J11: J2.49 J5.19 | length 39.5
  Top Layer w0.254: J2.49 94.314,79.899 94.688,79.899 108.147,66.44 108.147,65.589 J5.19
J12: J2.47 J5.21 | length 38.5
  Top Layer w0.254: J2.47 94.314,81.169 95.107,81.169 J5.21
J13: J2.48 J5.22 | length 47.7
  Top Layer w0.254: v1@89.156,81.409 J2.48@90.839,81.409
  Mid-Layer 1 w0.254: v1(89.154,81.407) 114.34,56.221 122.595,56.221 J5.22
J14: J2.53 J5.15 | length 42.1
  Top Layer w0.254: J2.53 94.314,77.359 94.688,77.359 107.131,64.916 107.131,61.525 J5.15
J15: J2.54 J5.16 | length 51.4
  Top Layer w0.254: v1@88.087,77.626 J2.54@90.817,77.626
  Mid-Layer 1 w0.254: v1(88.063,77.649) 89.653,77.649 118.702,48.601 122.595,48.601 J5.16
K9: J2.39 J5.29 | length 36.4
  Top Layer w0.254: J2.39 97.042,86.492 118.637,64.897 J5.29
K10: J2.40 J5.30 | length 45.5
  Top Layer w0.254: v1@89.156,86.489 J2.40@90.839,86.489
  Mid-Layer 1 w0.254: v1(89.154,86.487) 109.26,66.381 122.595,66.381 J5.30
NetJ4_1: J4.1 R1.2 R2.2 R3.2 | length 9.5
  Top Layer w0.254: R1.2 106.06,97.97 R2.2 ; R3.2 106.133,100.149 R2.2 ; J4.1 111.26,100.076 R2.2
NetJ4_2: J4.2 R4.2 R5.2 R6.2 | length 17
  Top Layer w0.254: R5.2@99.456,97.89 99.758,97.588 100.864,97.588 101.55,96.901 110.439,96.901 111.205,97.667 J4.2 ; R4.2 99.508,97.864 R5.2 99.529,97.99 R6.2
NetJ4_3: J4.3 R7.2 R8.2 | length 14.9
  Top Layer w0.254: R8.2 99.635,93.197 R7.2 109.22,93.218 J4.3
NetJ4_13: J4.13 R10.2 | length 18.4
  Top Layer w0.254: R10.2 107.751,89.789 108.457,89.083 117.169,89.083 118.173,90.087 118.173,93.663 J4.13
NetJ4_14: J4.14 R9.2 | length 15.6
  Top Layer w0.254: R9.2 106.564,91.694 108.667,89.591 116.959,89.591 117.665,90.297 117.665,91.881 J4.14
VDD3.3: J1.15 J1.16
VDD12: J1.7 J1.8 J1.9 J1.10 J1.11 J1.12
W12: J2.38 J5.32 | length 47.2
  Top Layer w0.254: v1@88.087,87.786 J2.38@90.817,87.786
  Mid-Layer 1 w0.254: v1(88.063,87.809) 89.653,87.809 108.542,68.921 122.595,68.921 J5.32
W13: J2.37 J5.31 | length 35.9
  Top Layer w0.254: J2.37 96.671,87.762 116.996,67.437 J5.31
W14: J2.36 J5.34 | length 44.5
  Top Layer w0.254: v1@89.156,89.029 J2.36@90.839,89.029
  Mid-Layer 1 w0.254: v1(89.154,89.027) 106.72,71.461 122.595,71.461 J5.34
W15: J2.35 J5.33 | length 35.4
  Top Layer w0.254: J2.35 96.12,89.032 115.175,69.977 J5.33
Y15: J2.34 J5.36 | length 46.1
  Top Layer w0.254: v1@88.087,90.326 J2.34@90.817,90.326
  Mid-Layer 1 w0.254: v1(88.063,90.349) 89.653,90.349 106.002,74.001 122.595,74.001 J5.36
Y16: J2.33 J5.35 | length 34.8
  Top Layer w0.254: J2.33 95.568,90.302 111.321,74.549 119.507,74.549 J5.35
pads on no net: J1.17 J1.18 J1.19 J1.20 J1.21 J1.22 J1.23 J1.24 J1.79 J1.80 J1.81 J1.82 J1.83 J1.84 J1.85 J1.86 J1.87 J1.88 J1.89 J1.90 J1.91 J1.92 J1.93 J1.94 J1.95 J1.96 J1.97 J1.98 J1.99 J1.100 J1.101 J1.102 J2.1 J2.2 J2.3 J2.4 J2.5 J2.6 J2.7 J2.8 J2.9 J2.10 J2.11 J2.12 J2.13 J2.14 J2.15 J2.16 J2.17 J2.18 J2.85 J2.87 J2.88 J2.89 J2.90 J2.91 J2.92 J2.93 J2.94 J2.95 J2.96 J2.97 J2.98 J2.99 J2.100 J2.101 J2.102 J3.5 J3.6 J3.7 J3.8 J3.9 J3.10 J3.11 J3.12 J3.13 J3.14 J3.15 J3.16 J3.17 J3.18 J3.19 J3.20 J3.83 J3.84 J3.85 J3.86 J3.87 J3.88 J3.89 J3.90 J3.91 J3.92 J3.93 J3.94 J3.95 J3.96 J3.97 J3.98 J3.99 J3.100 J3.101 J3.102 J4.4 J4.5 J4.6 J4.7 J4.8 J4.9 J4.11 J4.12 J4.15 J4.MH1 J4.MH2 J5.1 J5.2 J5.3 J5.4

## Polygon pours and split planes (outlines as drawn)
GND on Mid-Layer 3 "GND_L04_P000" (solid, pour order 0): 25.4,127 131.064,127 131.064,25.4 25.4,25.4

## Silkscreen, mask and mechanical layers (free items; w line width, h text height)
Top Overlay:
  text "21" at 118.745,54.356 h0.76
  text "22" at 125.984,54.356 h0.76
  text "1" at 119.253,28.956 h0.76
  text "2" at 125.984,28.956 h0.76